# Altium PCB HeartPCB.PcbDoc
Units mil, origin at the board's own origin, x right, y up, seen from the top; angles counter-clockwise.
Board outline 3705 x 3560 mil, 2 copper layers (Top Layer, Bottom Layer); 25 components, 24 nets, 86 pads, 0 vias.
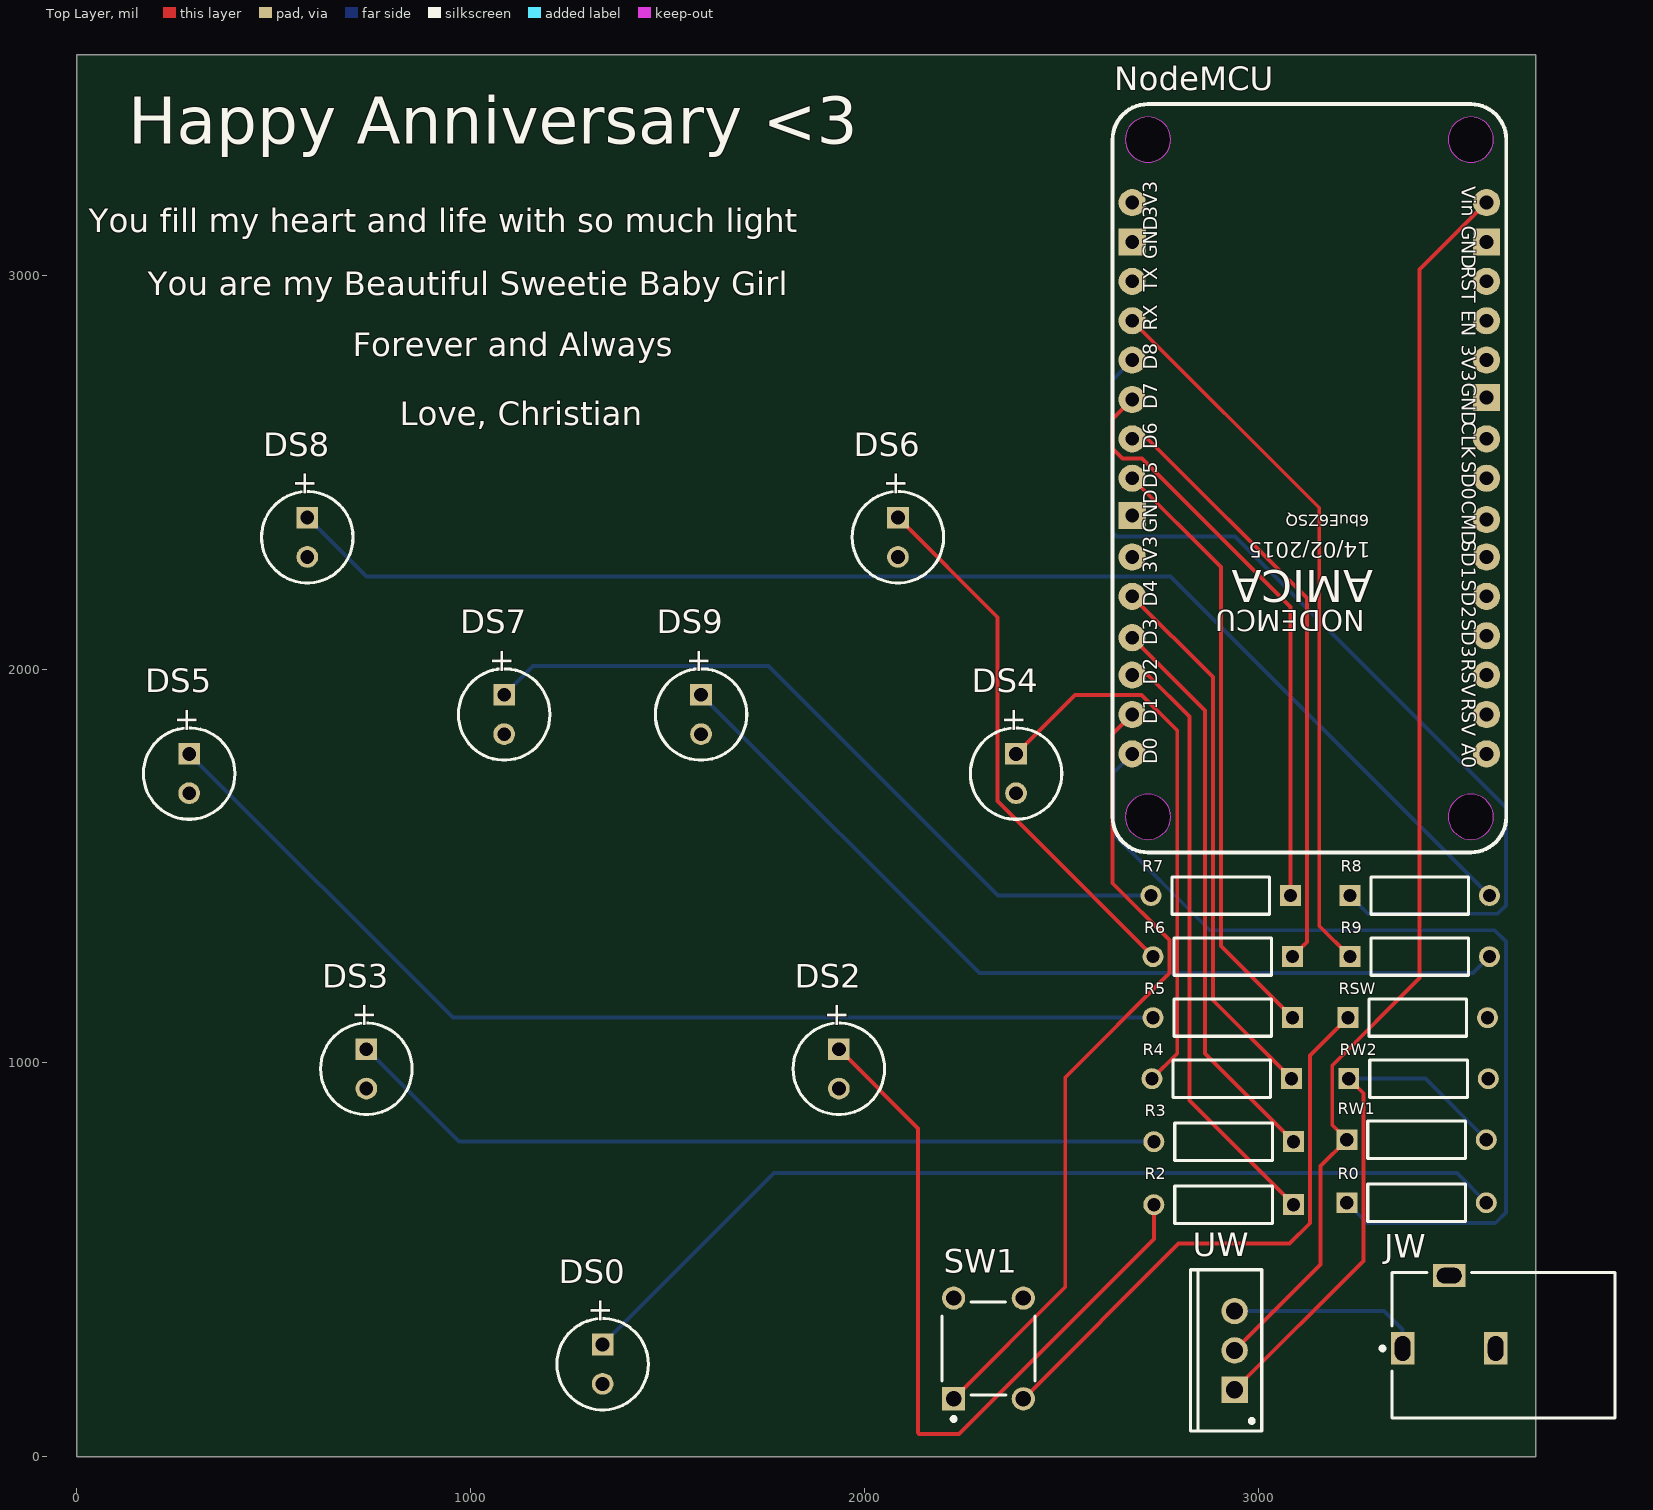
[diagram p0: Top Layer view]
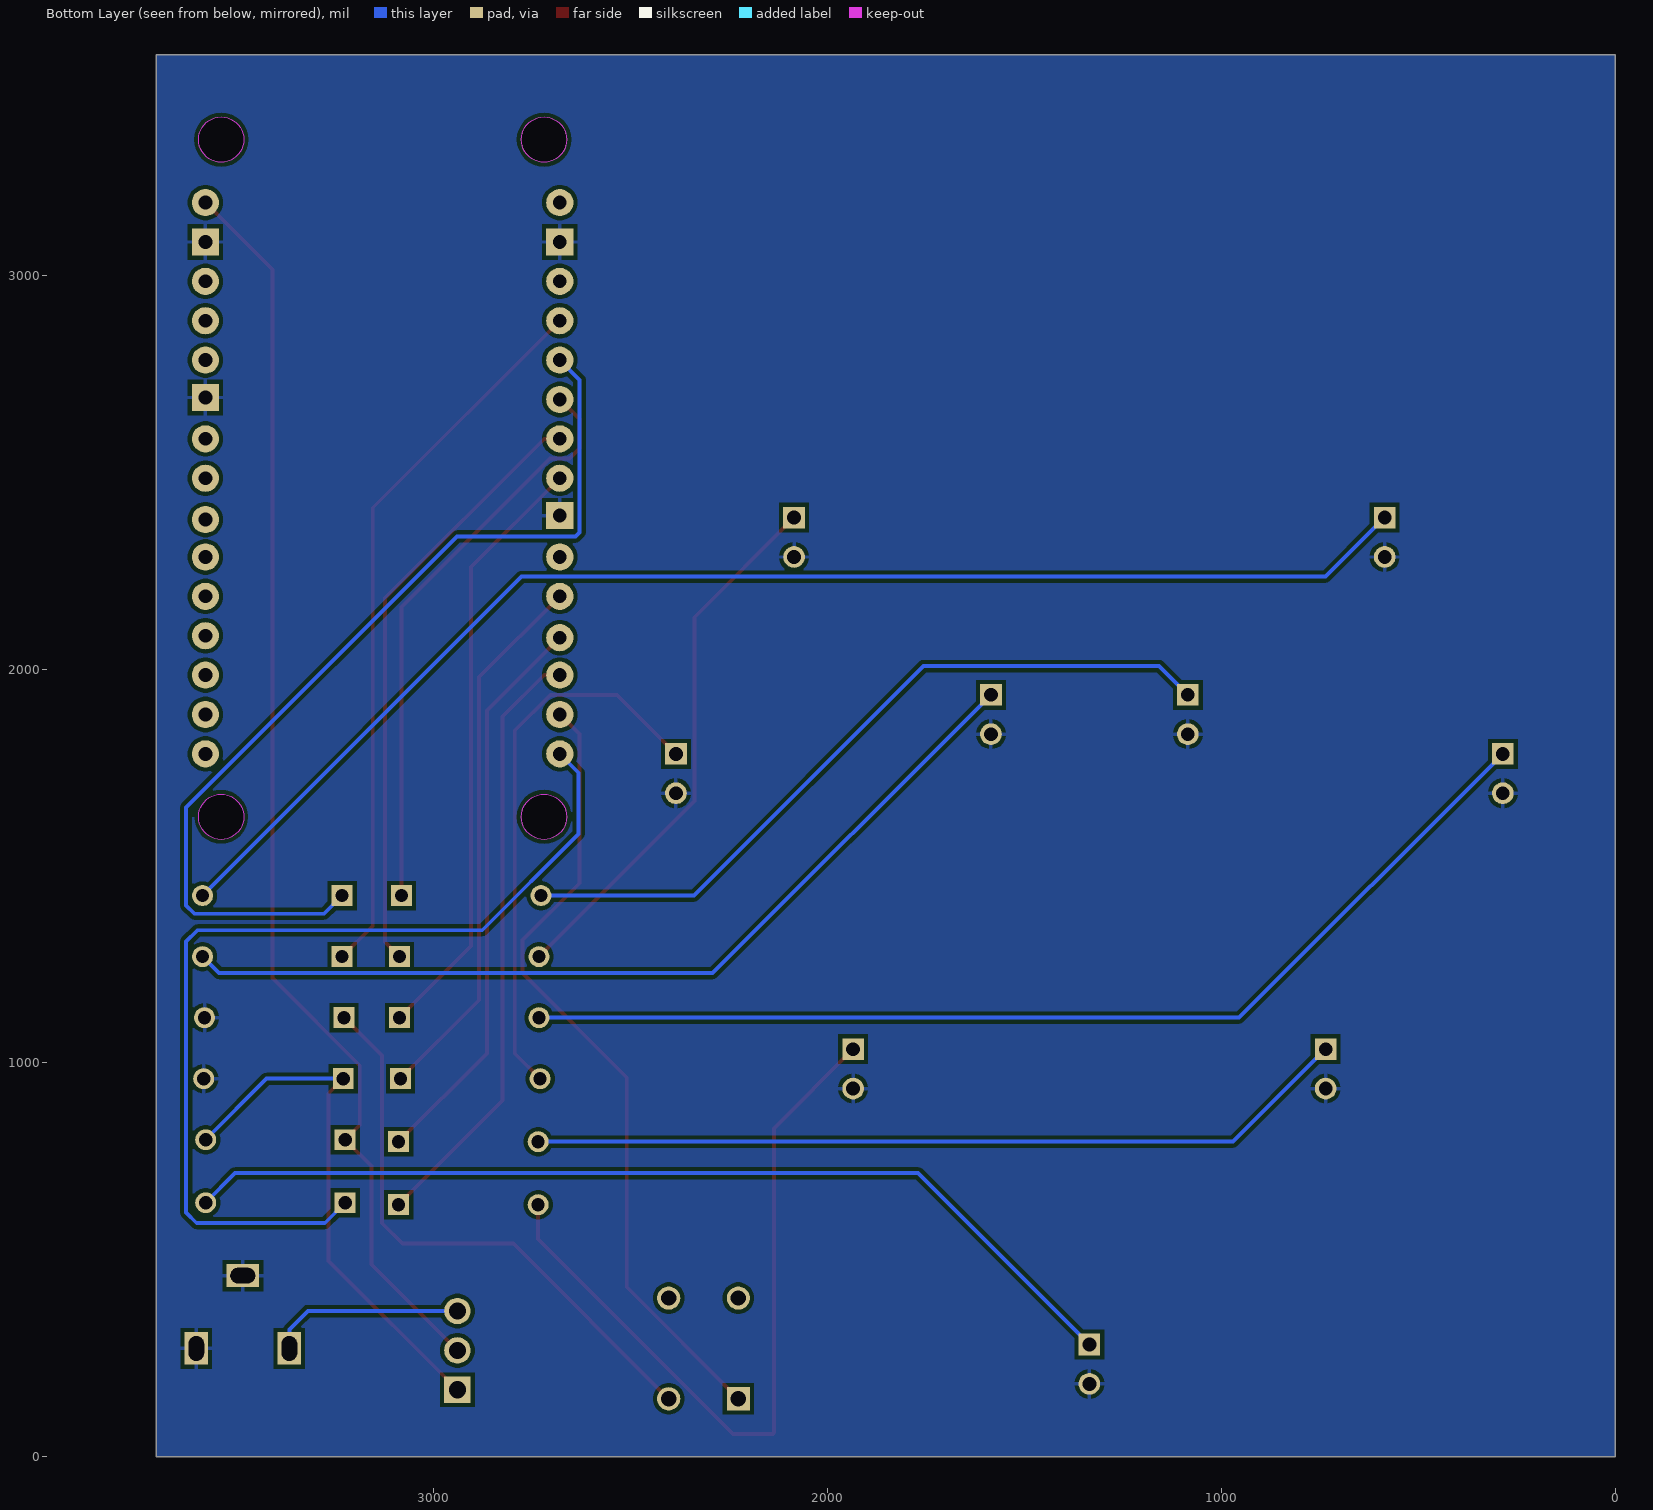
[diagram p1: Bottom Layer view, seen from below]

## Layer stack, top to bottom
Top Solder: solder mask 0.4, Solder Resist, Dk 3.5
Top Layer: signal copper 1.4
Dielectric 1: dielectric 12.6, FR-4, Dk 4.8
Bottom Layer: signal copper 1.4
Bottom Solder: solder mask 0.4, Solder Resist, Dk 3.5

## Board outline
0,0 3705,0 3705,3560 0,3560

## Design rules (kind name [scope] priority, off if disabled: settings)
Clearance [All] p1: gap=10 ignorepadtopadclearanceinfootprint=FALSE except(0: Arc-Hole Track-Hole SMDPad-Hole THPad-Hole Via-Hole Fill-Hole Poly-Hole Region-Hole Text-Hole)
PolygonConnect [All] p1: connectstyle=Relief reliefconductorwidth=10 reliefentries=4 polygonreliefangle="90 Angle" airgapwidth=10
RoutingVias [All] p1: holewidth=28 width=50 viastyle="Through Hole" minholewidth=28 minwidth=50 maxholewidth=28 maxwidth=50
SolderMaskExpansion [All] p1: expansion=4 istentingtop=FALSE
Width [All] p1: maxlimit=10 minlimit=10 preferedwidth=10
30 further rules are at their usual default settings.

## Components (designator, comment, footprint, x,y, rotation, side; value= is the part's Value field where it differs from the comment)
DS0 "WP7113SRD/D" KING-WP7113SRDD_V 1335,235 r270 top
DS2 "WP7113SRD/D" KING-WP7113SRDD_V 1935,985 r270 top
DS3 "WP7113SRD/D" KING-WP7113SRDD_V 735,985 r270 top
DS4 "WP7113SRD/D" KING-WP7113SRDD_V 2385,1735 r270 top
DS5 "WP7113SRD/D" KING-WP7113SRDD_V 285,1735 r270 top
DS6 "WP7113SRD/D" KING-WP7113SRDD_V 2085,2335 r270 top
DS7 "WP7113SRD/D" KING-WP7113SRDD_V 1085,1885 r270 top
DS8 "WP7113SRD/D" KING-WP7113SRDD_V 585,2335 r270 top
DS9 "WP7113SRD/D" KING-WP7113SRDD_V 1585,1885 r270 top
JW "PJ-102B" CUI-PJ-102B_V 3485,275 r0 top
NodeMCU "NodeMCU V1.0 ESP-12E" "NodeMCU V1.0 ESP-12E" 3631,1539 r180 top
R0 "MFR-25FBF52-250" RESA60-630X240 3402.17,645 r0 top
R2 "MFR-25FBF52-250" RESA60-630X240 2912.17,640 r180 top
R3 "MFR-25FBF52-250" RESA60-630X240 2912.17,800 r180 top
R4 "MFR-25FBF52-250" RESA60-630X240 2907.17,960 r180 top
R5 "MFR-25FBF52-250" RESA60-630X240 2910,1115 r180 top
R6 "MFR-25FBF52-250" RESA60-630X240 2910,1270 r180 top
R7 "MFR-25FBF52-250" RESA60-630X240 2905,1425 r180 top
R8 "MFR-25FBF52-1K" RESA60-630X240 3410,1425 r0 top
R9 "MFR-25FBF52-1K" RESA60-630X240 3410,1270 r0 top
RSW "MFR-25FBF52-10K" RESA60-630X240 3405,1115 r0 top
RW1 "MFR-25FBF52-330" RESA60-630X240 3402.17,805 r0 top
RW2 "MFR-25FBF52-1K" RESA60-630X240 3407.17,960 r0 top
SW1 "1825910-6" TECO-1825910-6_V 2315,275 r90 top
UW "LM317T" TO-220 2940,270 r90 top

## Footprints (in the part's own frame and the unit in brackets; to place one, negate y for a bottom-side part, rotate by r counter-clockwise, add the part's x,y. Pads: shape width x height; smd on the part's side, far side on the other; paste and mask are expansions set on the pad)
CUI-PJ-102B_V [mm] "THD, 3-Leads, Body 14.4x9mm, Height 11mm"
  rect 1.5x2.1 hole 1 slot 1.6 at 90 deg: 1(-3,0) 2(3,0)
  rect 2.1x1.5 hole 1 slot 1.6 at 0 deg: 3(0,4.7)
  silkscreen extent -4.42,-4.5 10.7,4.9, body extent -3.7,-4.5 10.7,4.9, height 11
KING-WP7113SRDD_V [mm] "THD, 2-Leads, Dia 5.9mm, Body Length 8.6mm"
  rect 1.4x1.4 hole 0.889: 1(-1.27,0)
  round 1.4 hole 0.889: 2(1.27,0)
  silkscreen extent -2.95,-2.95 2.95,2.95, body extent -2.95,-2.95 2.5,2.95, height 15.5
"NodeMCU V1.0 ESP-12E" [mil]
  round 115 hole 115 unplated paste-300 mask-300: 0(91,-86) 0(91,-1806) 0(911,-86) 0(911,-1806)
  round 69 hole 35: 3V3(51,-1246) 3V3(951,-746) 3V3(951,-1646) A0(51,-246) CLK(51,-1046) CMD(51,-841) D0(951,-246) D1(951,-346) D2(951,-446) D3(951,-541) D4(951,-646) D5(951,-946) D6(951,-1046) D7(951,-1146) D8(951,-1246) EN(51,-1346) RST(51,-1446) RSV(51,-346) RSV(51,-446) RX(951,-1346) SD0(51,-946) SD1(51,-746) SD2(51,-646) SD3(51,-546) TX(951,-1446) VIN(51,-1646)
  rect 69x69 hole 35: GND(51,-1151) GND(51,-1546) GND(951,-851) GND(951,-1546)
  Keep-Out Layer circle w2: c911,-1806 r57.5
  Keep-Out Layer circle w2: c91,-1806 r57.5
  Keep-Out Layer circle w2: c911,-86 r57.5
  Keep-Out Layer circle w2: c91,-86 r57.5
  silkscreen extent 1,-1896 1001,4
RESA60-630X240 [mm] "Axial Resistor, 2-Leads, Dia 2.4mm, Body Length 6.3mm"
  rect 1.35x1.35 hole 0.85: 1(-4.5,0)
  round 1.35 hole 0.85: 2(4.5,0)
  silkscreen extent -3.15,-1.2 3.15,1.2, body extent -3.15,-1.2 3.15,1.2, height 2.4
TECO-1825910-6_V [mm] "Switch, 4-Leads, Body 5.99x5.99mm"
  rect 1.5x1.5 hole 0.99: 1(-3.25,2.25)
  round 1.5 hole 0.99: 2(3.25,2.25) 3(-3.25,-2.25) 4(3.25,-2.25)
  silkscreen extent -4.67,-3 3,3, body extent -3,-2.99 2.99,3, height 5
TO-220 [mm] "TO, Thru-Hole, Vertical, Heatsink Mounted; 3 In-Line Leads; Pitch 2.54 mm"
  rect 1.7x1.7 hole 1.1: 1(-2.54,0)
  round 1.7 hole 1.1: 2(0,0) 3(2.54,0)
  silkscreen extent -5.2,-1.75 5.2,2.85, body extent -5.25,-1.8 5.25,2.9, height 19.7

## Part data
DS0 DS2 DS3 DS4 DS5 DS6 DS7 DS8 DS9: library part CMP-007-00033-2, "The Super Bright Red Source Color Device, 1.85 V, -40 to 85 degC, 2-Pin THD, RoHS, Tape and Reel", Case/Package=Radial, Colour=Red, Forward Voltage=1.85V, Manufacturer=Kingbright, Package Description="2-Pin Through Hole Device, Dia 5.9 mm, Body Length 8.6 mm", Package Quantity=500, Package Reference=WP7113SRDD, Datasheet URL=http://www.kingbrightusa.com/images/catalog/SPEC/WP7113SRD-D.pdf, Datasheet Version="Rev. 6A, 07/2016", Illumination Colour=Red, Lens Style=Diffused, Luminous Intensity=300mcd, Mounting Technology=TH, Nominal Vf=1.85V, Packaging=Bulk, RoHS Compliant=True, Viewing Angle=30degrees
JW: library part CMP-2000-06900-1, "Through Hole Right Angle DC Power Jack, 2.5 A, 2.5 mm Center Pin, 3 Position, -25 to 85 degC, RoHS, Bulk", Current Rating=2.5A, Flammability Rating=UL94V-0, Insulation Resistance=100MOhms, Manufacturer=CUIInc., Operating Temperature Range=-25Cto+85C, Package Description="3-Pin Through Hole Device, Body 14.4 x 9 mm, Height 11 mm", Voltage Rating=24V, Brand=CUI, Connector Type=DCPowerJack, Contact Gender=Male, Contact Material=Copper, Contact Plating=Nickel, Datasheet URL=http://www.cui.com/product/resource/pj-102b.pdf, Datasheet Version="Rev. 1.03, 04/2016", Factory Pack Quantity=280, Housing Material=PolybutyleneTerephthalate(PBT), Inside Contact Diameter=2.5mm, Manufacturer URL=http://www.cui.com/, Mounting Angle=Right, Mounting Style=ThroughHole, Mounting Technology=ThroughHole, Outside Contact Diameter=6.5mm, Package Reference=PJ-102B, Packaging=Bulk, Product=Jacks, Product Category=DCPowerConnectors, RoHS=True, Termination Style=ThroughHole
NodeMCU: "NodeMCU V1.0 ESP8266 (ESP-12E)"
R0 R2 R3 R4 R5 R6 R7 R8 R9 RSW RW1 RW2: library part CMP-1659-00075-1, "Axial Resistor, 1 KOhm, +/- 1%, 250 mW, -55 to 155 degC, 2-Pin THD, RoHS, Bulk", Case\Package=Axial, Max Operating Temperature="155 degC", Min Operating Temperature="-55 degC", Package Quantity=200, Power Rating="250 mW", Resistance="10 kohm", Tolerance=1%, Voltage Rating="250 V", ComponentLink1Description="Manufacturer URL", ComponentLink1URL=http://www.yageo.com/, ComponentLink2Description=Datasheet, ComponentLink2URL=http://www.yageo.com/documents/recent/Yageo%20LR_MFR_2013.pdf, DatasheetVersion=Apr-13, Length="0.248 inch", PackageDescription="2-Pin Axial Lead, Dia 2.4 mm, Body Length 6.3 mm", PackageReference=MFR-25, Packaging=Bulk, RoHSCompliant=true
SW1: library part CMP-1684-00021-1, "Tact Switch, SPST-NO, 0.05 A, -35 to 85 degC, 4-Pin THD, RoHS, Bulk", Actuator Color=Black, Contact Rating @ Voltage=0.05A@24VDC, Dielectric Strength=500VAC, Manufacturer="TE Connectivity", Maximum AC Voltage Rating=N/A, Maximum Contact Resistance=100mOhm, Maximum DC Voltage Rating=24V, Minimum Insulation Resistance=100MOhm, Operating Temperature=-35to85C, Package Description="4-Pin Through Hole Device, Body 5.99 x 5.99 mm, Pitch 6.5 mm", Package Reference=THD, Actuator Length=1.4mm, Actuator Material=PolybutyleneTerephthalate, Actuator Style=RoundButton, Base Material=N/A, Body Orientation=Straight, Bushing Type=Unthreaded, Contact Material=CopperAlloy, Contact Plating=Silver, Datasheet URL=http://www.te.com/commerce/DocumentDelivery/DDEController?Action=showdoc&DocId=Customer+Drawing%7F1825910%7FC9%7Fpdf%7FEnglish%7FENG_CD_1825910_C9.pdf%7F1825910-6, Datasheet Version="Rev. C9", Dimension=5.99x5mm, Electrical Life=100000Cycles, Family=1825910, Function=MomentaryContact, Housing Material=N/A, Illumination=N/R, Manufacturer URL=http://www.te.com, Mechanical Life=100000Cycles, Mounting=ThroughHole, Packaging=N/A, Part No=1825910-6, Pole Throw Configuration=SPST, Product Weight=N/A, RoHS=Yes, Seal Description=N/A, Seal Location=N/A, Switch Configuration=OFF(ON), Terminal Type=PCPins, Thread Size=N/R
UW: library part CMP-0244-00444-1, "1.5A, 1.2V to 37V Adjustable Voltage Regulator, 3-Pin TO-220", ComponentLink1Description="Manufacturer URL", ComponentLink1URL=http://www.st.com, ComponentLink2Description=Datasheet, ComponentLink2URL=http://www.st.com/internet/com/TECHNICAL_RESOURCES/TECHNICAL_LITERATURE/DATASHEET/CD00000455.pdf, ComponentLink3Description="Package Specification", ComponentLink3URL=http://www.st.com/internet/com/TECHNICAL_RESOURCES/TECHNICAL_LITERATURE/PACKAGE_INFORMATION/CD00004649.pdf, DatasheetVersion=1/11/2011, PackageDescription="TO, Thru-Hole, Vertical, Heatsink Mounted; 3 In-Line Leads; Pitch 2.54 mm", PackageReference=TO-220, PackageVersion=2011

## Nets (pads, with @x,y where several pads share a name; then routed paths per layer and width w, separated by ;. In a path a pad name is that pad's centre, name@x,y a point inside that pad or via, vN(x,y) a via of type N, cw(c..) or ccw(c..) an arc to the next point about the centre after c; other vN are vias at no path point)
+5: NodeMCU.VIN RW1.1 UW.2 | length 3210.7
  Top Layer w10: UW.2 3158,488 3158,738 RW1.1 3188,842 3188,994 3410,1216 3410,3015 NodeMCU.VIN
D0: NodeMCU.D0 R0.1 | length 2458.1
  Bottom Layer w10: NodeMCU.D0 2632,1737 2632,1582 2877,1337 3600,1337 3629,1308 3629,620 3602,593 3277,593 R0.1
D1: NodeMCU.D1 SW1.1 | length 2045.5
  Top Layer w10: SW1.1 2510,430.63 2510,963.59 2774.41,1228 2774.41,1312 2630,1456.41 2630,1835 NodeMCU.D1
D2: NodeMCU.D2 R2.1 | length 1537.7
  Top Layer w10: NodeMCU.D2 2719.49,1985 2825,1879.49 2825,904.33 R2.1
D3: NodeMCU.D3 R3.1 | length 1449.6
  Top Layer w10: NodeMCU.D3 2865,1895 2865,1024.33 R3.1
D4: NodeMCU.D4 R4.1 | length 1392.5
  Top Layer w10: NodeMCU.D4 2885,1980 2885,1159.33 R4.1
D5: NodeMCU.D5 R5.1 | length 1538.7
  Top Layer w10: NodeMCU.D5 2905,2260 2905,1297.17 R5.1
D6: NodeMCU.D6 R6.1 | length 1537.3
  Top Layer w10: NodeMCU.D6 2719.49,2585 3124,2180.49 3124,1306.83 R6.1
D7: NodeMCU.D7 R7.1 | length 1497.3
  Top Layer w10: NodeMCU.D7 2630,2635 2630,2560 2655,2535 2705,2535 3082.17,2157.83 R7.1
D8: NodeMCU.D8 R8.1 | length 2419.8
  Bottom Layer w10: NodeMCU.D8 2630,2735 2630,2347 2640,2337 2941,2337 3629,1649 3629,1400 3608,1379 3278.83,1379 R8.1
D9: NodeMCU.RX R9.1 | length 1844
  Top Layer w10: NodeMCU.RX 3155,2410 3155,1347.83 R9.1
GND: DS0.2 DS2.2 DS3.2 DS4.2 DS5.2 DS6.2 DS7.2 DS8.2 DS9.2 JW.2 JW.3 NodeMCU.GND RSW.2 RW2.2
NetDS0_1: DS0.1 R0.2 | length 2455.6
  Bottom Layer w10: DS0.1 1770,720 3504.33,720 R0.2
NetDS2_1: DS2.1 R2.2 | length 1949.5
  Top Layer w10: DS2.1 2136,834 2136,61 2139,58 2240,58 2735,553 R2.2
NetDS3_1: DS3.1 R3.2 | length 2097.3
  Bottom Layer w10: DS3.1 970,800 R3.2
NetDS4_1: DS4.1 R4.2 | length 1420.3
  Top Layer w10: DS4.1 2535,1935 2704,1935 2794.41,1844.59 2794.41,1024.41 R4.2
NetDS5_1: DS5.1 R5.2 | length 2725.4
  Bottom Layer w10: DS5.1 955,1115 R5.2
NetDS6_1: DS6.1 R6.2 | length 1383.3
  Top Layer w10: DS6.1 2338,2132 2338,1664.83 R6.2
NetDS7_1: DS7.1 R7.2 | length 1914.6
  Bottom Layer w10: DS7.1 1158,2008 1756,2008 2339,1425 R7.2
NetDS8_1: DS8.1 R8.2 | length 3399.8
  Bottom Layer w10: DS8.1 735,2235 2777.17,2235 R8.2
NetDS9_1: DS9.1 R9.2 | length 2312.4
  Bottom Layer w10: DS9.1 2292,1228 3545.17,1228 R9.2
NetJW_1: JW.1 UW.3 | length 494.4
  Bottom Layer w10: UW.3 3320,370 3366.89,323.11 JW.1
NetRSW_1: RSW.1 SW1.3 | length 1474.8
  Top Layer w10: SW1.3 2797.53,541 3080,541 3132,593 3132,1019.17 RSW.1
NetRW1_2: RW1.2 RW2.1 UW.1 | length 1354.3
  Top Layer w10: UW.1 3267,497 3267,923 RW2.1
  Bottom Layer w10: RW2.1 3424.33,960 RW1.2
pads on no net: NodeMCU.0 NodeMCU.3V3 NodeMCU.A0 NodeMCU.CLK NodeMCU.CMD NodeMCU.EN NodeMCU.RST NodeMCU.RSV NodeMCU.SD0 NodeMCU.SD1 NodeMCU.SD2 NodeMCU.SD3 NodeMCU.TX SW1.2 SW1.4

## Polygon pours and split planes (outlines as drawn)
GND on Bottom Layer "GND_L02_P001" (solid, pour order 1): 0,0 3705,0 3705,3560 0,3560
GND on Bottom Layer "GND_L02_P000" (solid, pour order 0): 0,0 3705,0 3705,3560 0,3560

## Silkscreen, mask and mechanical layers (free items; w line width, h text height)
Top Overlay:
  text "Happy Anniversary <3" at 130,3334.99 h120
  text "You fill my heart and life with so much light" at 30,3109.99 h60
  text "You are my Beautiful Sweetie Baby Girl" at 180,2949.99 h60
  text "Forever and Always" at 700,2794.99 h60
  text "Love, Christian" at 820,2619.99 h60

## Text inside footprints (layer, text, board x,y; h text height)
DS0: Top Overlay "+" at 1305,405 h59.06 r270
DS2: Top Overlay "+" at 1905,1155 h59.06 r270
DS3: Top Overlay "+" at 705,1155 h59.06 r270
DS4: Top Overlay "+" at 2355,1905 h59.06 r270
DS5: Top Overlay "+" at 255,1905 h59.06 r270
DS6: Top Overlay "+" at 2055,2505 h59.06 r270
DS7: Top Overlay "+" at 1055,2055 h59.06 r270
DS8: Top Overlay "+" at 555,2505 h59.06 r270
DS9: Top Overlay "+" at 1555,2055 h59.06 r270
NodeMCU: Top Overlay "14/02/2015" at 3286,2337 h69 r180; Top Overlay "AMICA" at 3292,2278 h140 r180; Top Overlay "NODEMCU" at 3271,2168 h90 r180; Top Overlay "6buE6ZSQ" at 3282,2392 h30 r180; Top Overlay "CLK" at 3505,2629 h60 r270; Top Overlay "SD0" at 3505,2528.57 h60 r270; Top Overlay "SD1" at 3505,2327.71 h60 r270; Top Overlay "SD2" at 3505,2227.29 h60 r270; Top Overlay "SD3" at 3505,2126.86 h60 r270; Top Overlay "RSV" at 3505,2026.43 h60 r270; Top Overlay "RSV" at 3505,1926 h60 r270; Top Overlay "A0" at 3505,1812 h60 r270; Top Overlay "D5" at 2755,2460 h60 r90; Top Overlay "GND" at 2755,2346 h60 r90; Top Overlay "3V3" at 2755,2244.01 h60 r90; Top Overlay "D4" at 2755,2159 h60 r90; Top Overlay "D3" at 2755,2060.58 h60 r90; Top Overlay "D2" at 2755,1960.58 h60 r90; Top Overlay "D1" at 2755,1860.35 h60 r90; Top Overlay "D0" at 2755,1759 h60 r90; Top Overlay "CMD" at 3505,2428.14 h60 r270; Top Overlay "D6" at 2755,2559.12 h60 r90; Top Overlay "3V3" at 2755,3145 h60 r90; Top Overlay "GND" at 2755,3041.2 h60 r90; Top Overlay "TX" at 2755,2958 h60 r90; Top Overlay "RX" at 2755,2859.06 h60 r90; Top Overlay "D8" at 2755,2760.11 h60 r90; Top Overlay "D7" at 2755,2660.23 h60 r90; Top Overlay "Vin" at 3505,3226 h60 r270; Top Overlay "GND" at 3505,3126 h60 r270; Top Overlay "RST" at 3505,3023 h60 r270; Top Overlay "EN" at 3505,2911 h60 r270; Top Overlay "3V3" at 3505,2824 h60 r270; Top Overlay "GND" at 3505,2727 h60 r270